# Altium PCB PCB.PcbDoc
Units mil, origin at the board's own origin, x right, y up, seen from the top; angles counter-clockwise.
Board outline 3460 x 2415 mil, 2 copper layers (Top Layer, Bottom Layer); 24 components, 26 nets, 88 pads, 0 vias.
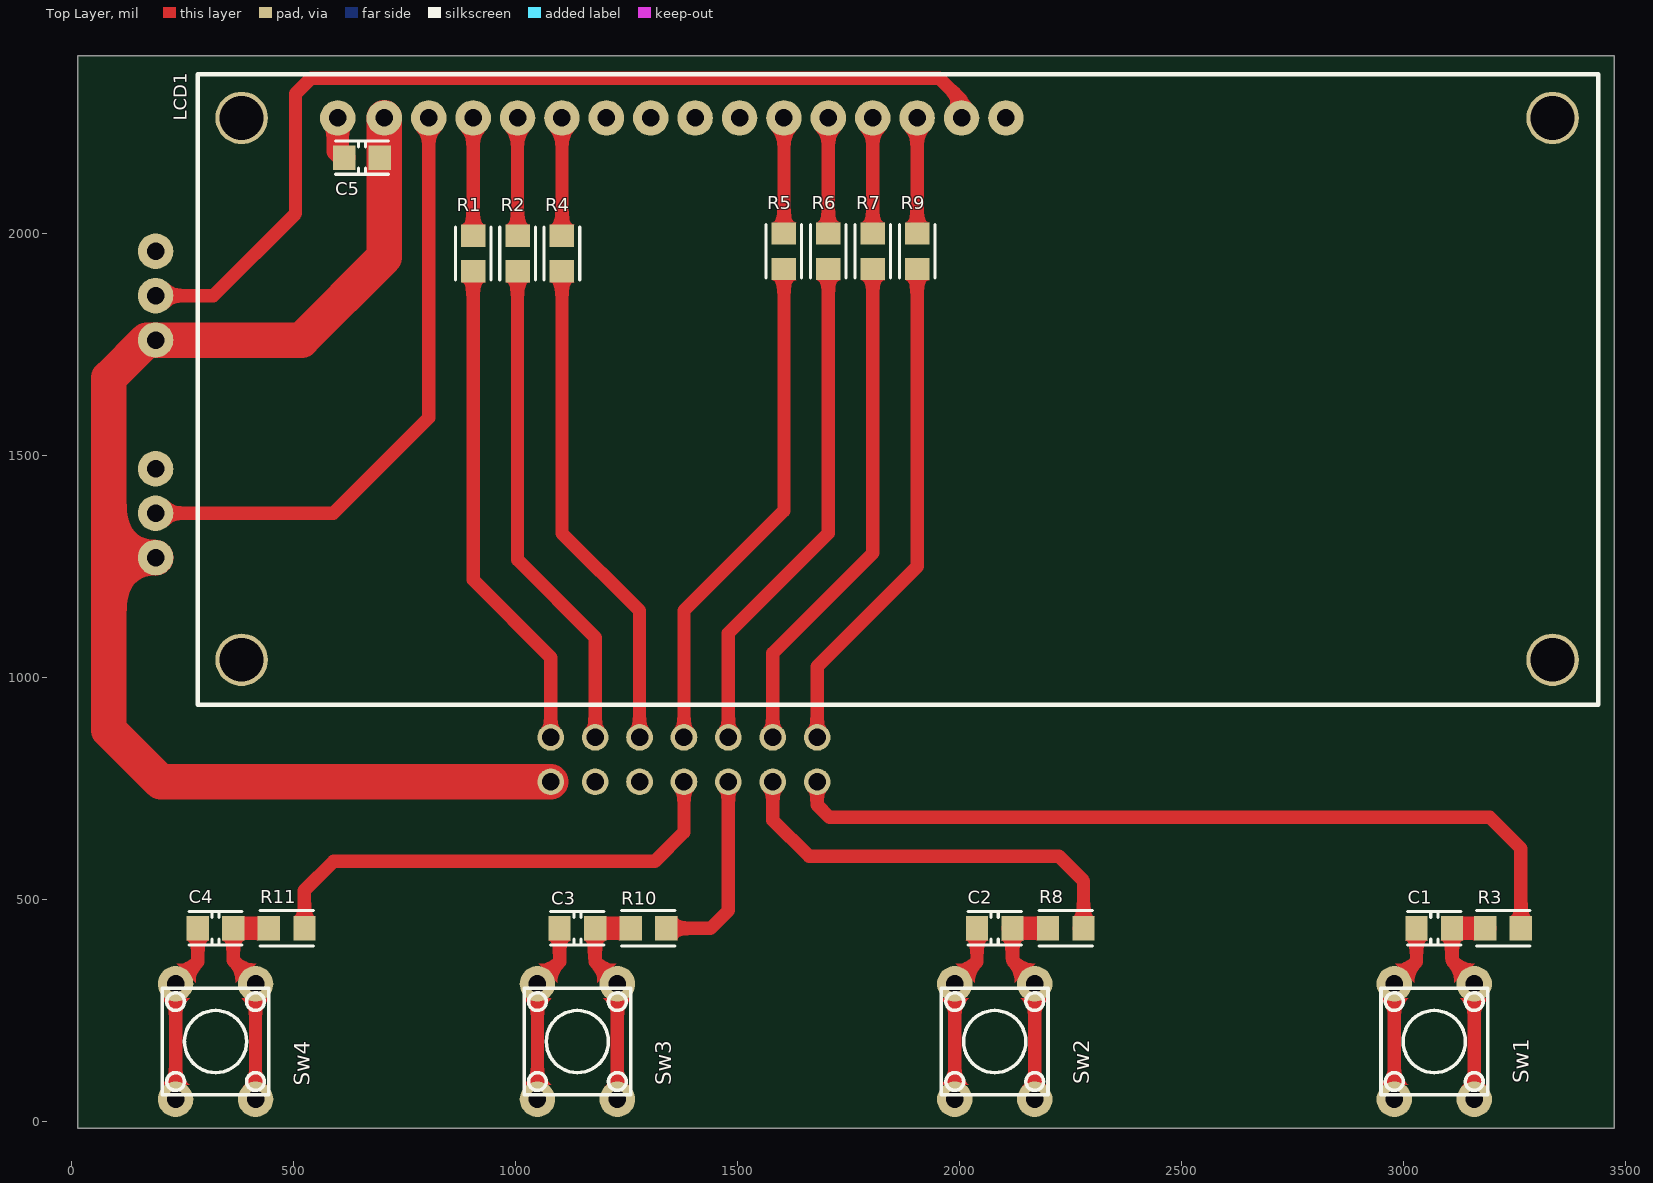
[diagram p0: Top Layer view]
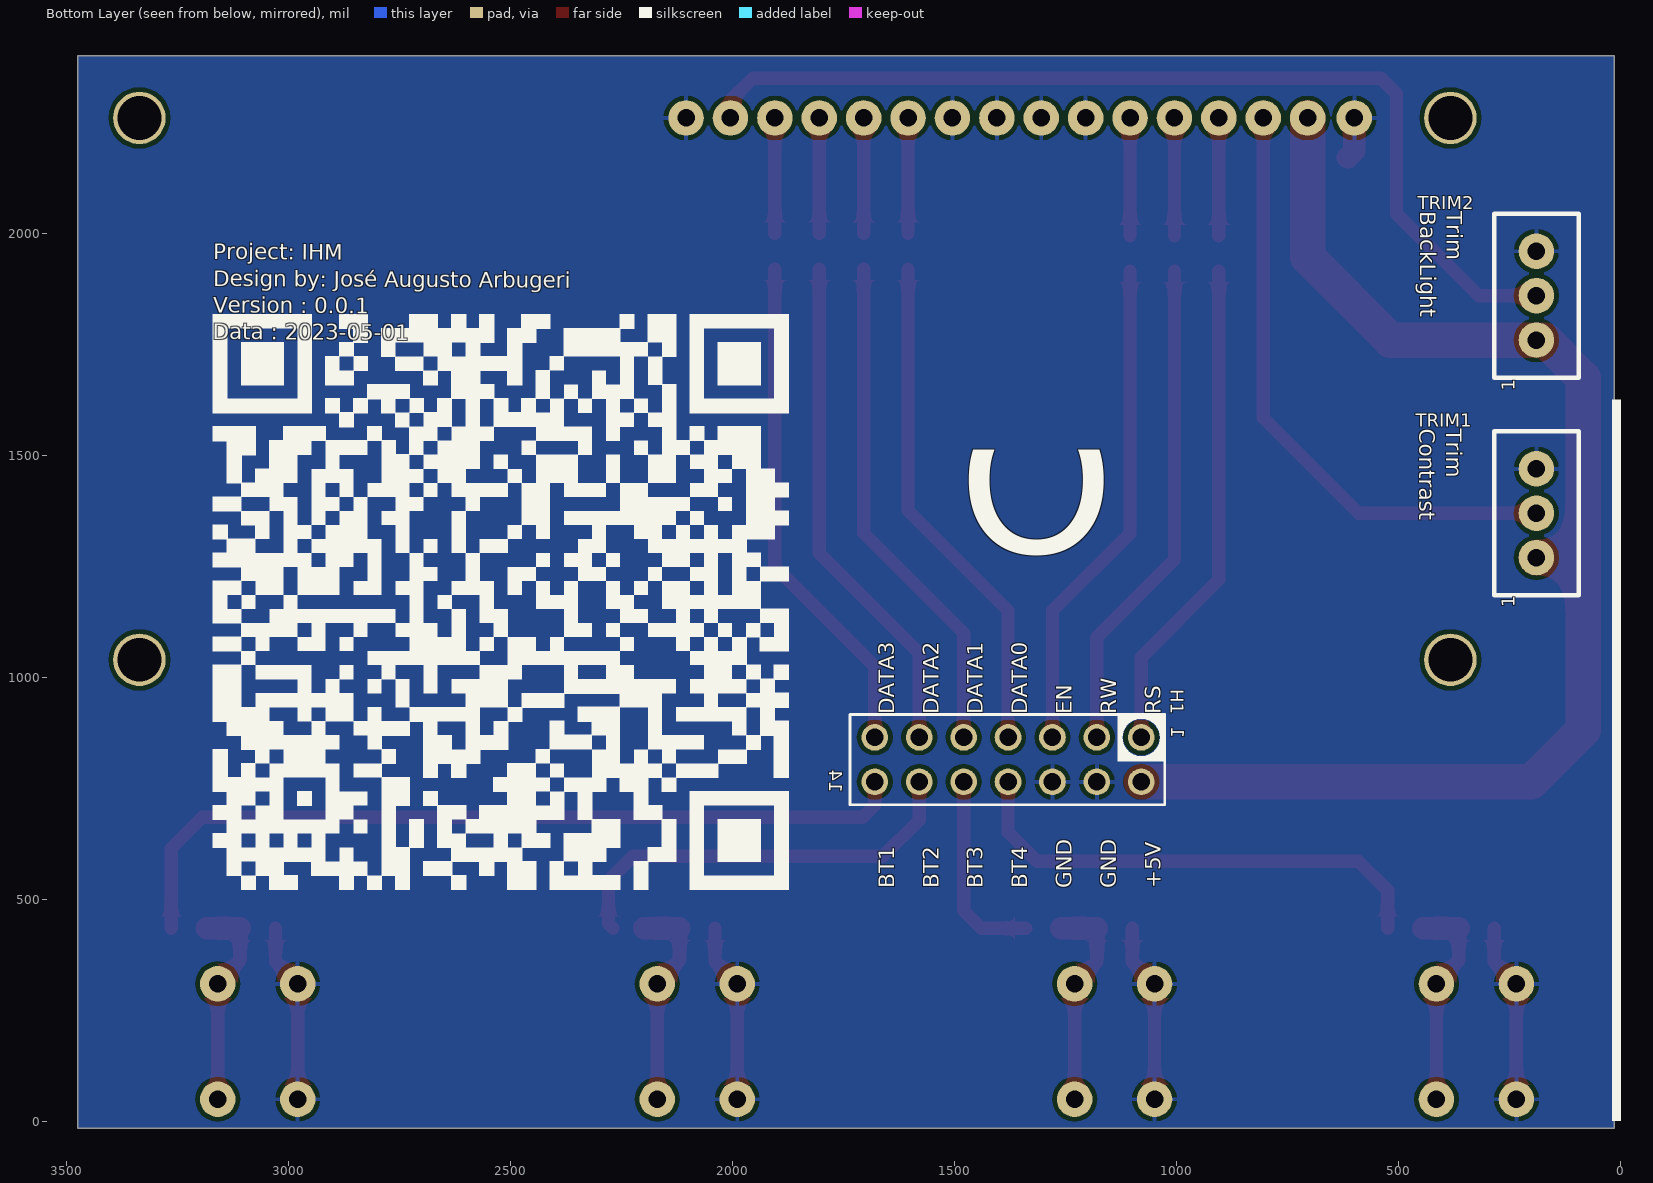
[diagram p1: Bottom Layer view, seen from below]
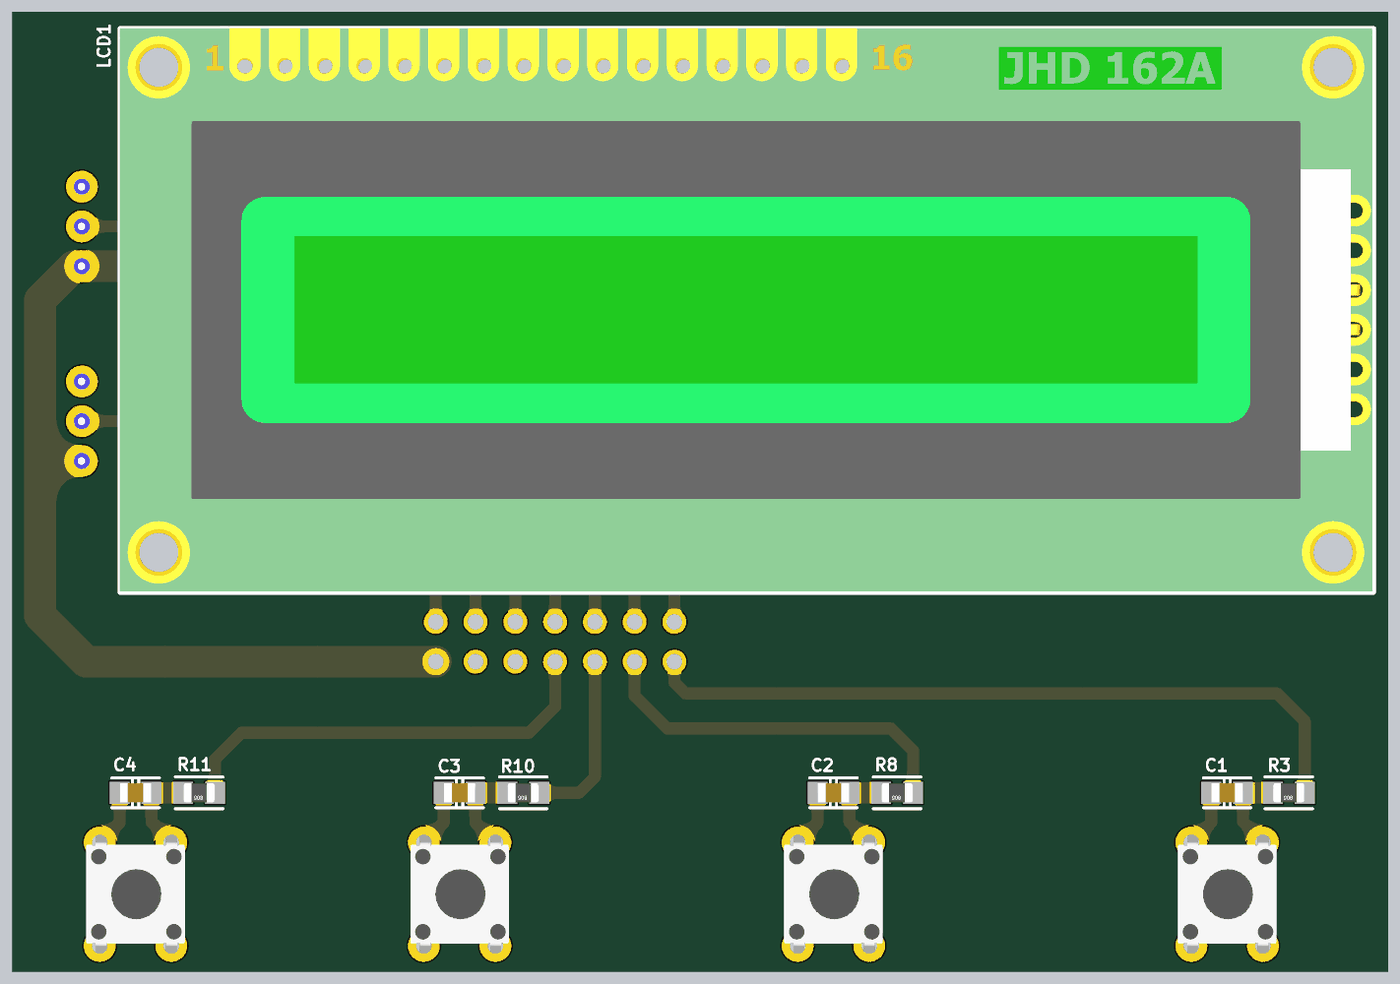
[diagram p2: 3D render of the assembled board from above, using the file's embedded part models]

## Layer stack, top to bottom
Top Solder: solder mask 0.4, Solder Resist, Dk 3.5
Top Layer: signal copper 1.4
Dielectric 1: dielectric 12.6, FR-4, Dk 4.8
Bottom Layer: signal copper 1.4
Bottom Solder: solder mask 0.4, Solder Resist, Dk 3.5

## Board outline
3475.25,2398.97 15.25,2398.97 15.25,-16.03 3475.25,-16.03

## Design rules (kind name [scope] priority, off if disabled: settings)
Clearance [All] p1: gap=10 ignorepadtopadclearanceinfootprint=FALSE except(0: Arc-Hole Track-Hole SMDPad-Hole THPad-Hole Via-Hole Fill-Hole Poly-Hole Region-Hole Text-Hole)
PolygonConnect [All] p1: connectstyle=Relief reliefconductorwidth=10 reliefentries=4 polygonreliefangle="90 Angle" airgapwidth=10
RoutingVias [All] p1: holewidth=28 width=50 viastyle="Through Hole" minholewidth=28 minwidth=50 maxholewidth=28 maxwidth=50
SilkToSilkClearance [All] p1: silktosilkclearance=0
SilkToSolderMaskClearance [IsPad] p1: minsilkscreentomaskgap=0 clearancetoexposedcopper=TRUE
SolderMaskExpansion [All] p1: expansion=4
Width [All] p1: maxlimit=100 minlimit=10 preferedwidth=30 minimp=50.000000 maximp=50.000000 favimp=50.000000
28 further rules are at their usual default settings.

## Components (designator, comment, footprint, x,y, rotation, side; value= is the part's Value field where it differs from the comment)
C1 "0805" 0805C 3070.25,433.97 r180 top value=100nF
C2 "0805" 0805C 2080.25,433.97 r180 top value=100nF
C3 "0805" 0805C 1140.25,433.97 r180 top value=100nF
C4 "0805" 0805C 325.25,433.97 r180 top value=100nF
C5 "0805" 0805C 655,2170 r180 top value=100nF
H1 "Header 2x7 Macho" "HEADER 2X7" 1380.25,813.97 r0 bottom
LCD1 "LCD*" LCD16X2 1860.25,1648.97 r0 top locked
R1 "0805" 0805 905.44,1953.97 r90 top value=50R
R2 "0805" 0805 1005.44,1953.97 r90 top value=50R
R3 "0805" 0805 3225.25,433.97 r180 top value=50R
R4 "0805" 0805 1105.44,1953.97 r90 top value=50R
R5 "0805" 0805 1605.44,1958.97 r90 top value=50R
R6 "0805" 0805 1705.44,1958.97 r90 top value=50R
R7 "0805" 0805 1805.44,1958.97 r90 top value=50R
R8 "0805" 0805 2240.25,433.97 r180 top value=50R
R9 "0805" 0805 1905.44,1958.97 r90 top value=50R
R10 "0805" 0805 1300.25,433.97 r180 top value=50R
R11 "0805" 0805 485.25,433.97 r180 top value=50R
Sw1 "SW_PUSH_BUTTON" PUSH_BUTTON 3070.25,178.97 r180 top
Sw2 "SW_PUSH_BUTTON" PUSH_BUTTON 2080.25,178.97 r180 top
Sw3 "SW_PUSH_BUTTON" PUSH_BUTTON 1140.25,178.97 r180 top
Sw4 "SW_PUSH_BUTTON" PUSH_BUTTON 325.25,178.97 r180 top
TRIM1 "Trimpot Vertical" "Trimpot Vertical" 190.25,1268.97 r90 bottom value=10k
TRIM2 "Trimpot Vertical" "Trimpot Vertical" 190.25,1758.97 r90 bottom value=10k

## Footprints (in the part's own frame and the unit in brackets; to place one, negate y for a bottom-side part, rotate by r counter-clockwise, add the part's x,y. Pads: shape width x height; smd on the part's side, far side on the other; paste and mask are expansions set on the pad)
0805 [mil]
  rect 50x55 smd: 1(-40,0) 2(40,0)
  silkscreen extent -60,-40 60,40, body extent -39,-25 39,25, height 31
0805C [mil]
  rect 50x55 smd: 1(-40,0) 2(40,0)
  silkscreen extent -60,-38 60,38, body extent -39,-25 39,25, height 39
"HEADER 2X7" [mil] "Barra Pin 2x 7 Macho contatos (Altura 8.4mm) 180°"
  round 60 hole 39.37: 1(-300,-50) 2(-300,50) 3(-200,-50) 4(-200,50) 5(-100,-50) 6(-100,50) 7(0,-50) 8(0,50) 9(100,-50) 10(100,50) 11(200,-50) 12(200,50) 13(300,-50) 14(300,50)
  silkscreen extent -356,-103 356,102, body extent -350,-99 350,102, height 453
LCD16X2 [mm]
  round 2.032 hole 1: 0(-32,15.5) 1(-29.332,15.5) 2(-26.792,15.5) 3(-24.252,15.5) 4(-21.712,15.5) 5(-19.172,15.5) 6(-16.632,15.5) 7(-14.092,15.5) 8(-11.552,15.5) 9(-9.012,15.5) 10(-6.472,15.5) 11(-3.932,15.5) 12(-1.392,15.5) 13(1.148,15.5) 14(3.688,15.5) 15(6.228,15.5)
  round 3 hole 2.5: ""(-37.5,-15.5) ""(-37.5,15.5) ""(37.5,-15.5) ""(37.5,15.5)
  silkscreen extent -40,-18.07 40.11,18, body extent -40,-18 40,18, height 13.39
PUSH_BUTTON [mil]
  round 80 hole 39.37: 1(-90,130) 1(-90,-130) 2(90,130) 2(90,-130)
  silkscreen extent -120,-120 120,120, body extent -124,-156 120,156, height 170
"Trimpot Vertical" [mil]
  round 80 hole 39.37: 1(0,0) 2(100,0) 3(200,0)
  silkscreen extent -85,-95 285,95, body extent -81,-95 281,94, height 479

## Part data
C1 C2 C3 C4 C5: library part "Capacitor SMD 0805", "Capacitor SMD 0805"
LCD1: library part "LCD 16x2", "LCD 16x2"
R1 R2 R3 R4 R5 R6 R7 R8 R9 R10 R11: library part "Resistor SMD 0805 1/8 W", "Resistor SMD 0805 1/8 W", %=±1%, P=1/8W
Sw1 Sw2 Sw3 Sw4: library part SW-PB, "Switch Push Button", LatestRevisionDate=17-Jul-2002, LatestRevisionNote="Re-released for DXP Platform.", PackageReference=SPST-2, Published=24-Mar-1999, Publisher="Altium Limited"

## Nets (pads, with @x,y where several pads share a name; then routed paths per layer and width w, separated by ;. In a path a pad name is that pad's centre, name@x,y a point inside that pad or via, vN(x,y) a via of type N, cw(c..) or ccw(c..) an arc to the next point about the centre after c; other vN are vias at no path point)
+5V: C5.1 H1.2 LCD1.1 TRIM1.1 TRIM2.1 | length 2988.9
  Top Layer w80: TRIM1.1 85,1268.97 ; LCD1.1 705.44,2170 705.44,1945.44 518.97,1758.97 TRIM2.1 170.25,1758.97 85,1673.73 85,1268.97 ; H1.2 201.27,763.97 85,880.25 85,1268.97
A: LCD1.14 TRIM2.2 | length 2256.7
  Top Layer w30: TRIM2.2@170.25,1858.97 320.25,1858.97 505.25,2043.97 505.25,2313.97 540.25,2348.97 1955.25,2348.97 2005.44,2298.77 LCD1.14
BT1: C1.1 R3.2 Sw1.1 | length 480.7
  Top Layer w30: C1.1 3110.25,361.47 3160.25,311.47 3160.25,308.97 Sw1.1@3160.25,48.97
  Top Layer w50: C1.1 R3.2
BT1_O: H1.14 R3.1 | length 1857.7
  Top Layer w30: H1.14 1680.25,711.75 1708,684 3195.22,684 3265.25,613.97 R3.1
BT2: C2.1 R8.2 Sw2.1 | length 483.2
  Top Layer w30: C2.1 2120.25,361.47 Sw2.1@2170.25,311.47 ; Sw2.1@2170.25,48.97 Sw2.1@2170.25,308.97
  Top Layer w50: C2.1 R8.2
BT2_O: H1.12 R8.1 | length 953.9
  Top Layer w30: H1.12 1580.25,677.75 1662,596 2225,596 2280.25,540.75 2280.25,443.97 R8.1@2270.25,433.97
BT3: C3.1 R10.2 Sw3.1 | length 485.7
  Top Layer w30: C3.1 1180.25,358.97 1230.25,308.97 Sw3.1@1230.25,48.97
  Top Layer w50: C3.1 R10.2
BT3_O: H1.10 R10.1 | length 446.6
  Top Layer w30: R10.1 1440.25,433.97 1480.25,473.97 H1.10
BT4: C4.1 R11.2 Sw4.1 | length 483.2
  Top Layer w30: C4.1 365.25,361.47 Sw4.1@415.25,311.47 ; Sw4.1@415.25,48.97 Sw4.1@415.25,308.97
  Top Layer w50: C4.1 R11.2
BT4_O: H1.8 R11.1 | length 1108.3
  Top Layer w30: R11.1 525.25,519.25 591,585 1315.03,585 1380.25,650.22 H1.8
DATA0_I: H1.7 R5.1 | length 1148.3
  Top Layer w30: H1.7 1380.25,1148.97 1605.44,1374.17 R5.1
DATA1_I: H1.9 R6.1 | length 1148.3
  Top Layer w30: H1.9 1480.25,1098.97 1705.44,1324.17 R6.1
DATA2_I: H1.11 R7.1 | length 1148.3
  Top Layer w30: H1.11 1580.25,1053.97 1805.44,1279.17 R7.1
DATA3_I: H1.13 R9.1 | length 1148.3
  Top Layer w30: H1.13 1680.25,1023.77 1905.44,1248.97 R9.1
EN: LCD1.5 R4.2 | length 265.2
  Top Layer w30: R4.2 LCD1.5
EN_I: H1.5 R4.1 | length 1122.4
  Top Layer w30: R4.1 1105.44,1323.77 1280.25,1148.97 H1.5
GND: C1.2 C2.2 C3.2 C4.2 C5.2 H1.4 H1.6 LCD1.0 LCD1.6 LCD1.7 LCD1.8 LCD1.9 LCD1.15 Sw1.2 Sw2.2 Sw3.2 Sw4.2 TRIM1.3 TRIM2.3 | length 1718.1
  Top Layer w30: Sw4.2@235.25,48.97 235.25,308.97 285.25,358.97 C4.2 ; Sw3.2@1050.25,48.97 1050.25,308.97 1100.25,358.97 C3.2 ; Sw2.2@1990.25,48.97 1990.25,308.97 2040.25,358.97 C2.2 ; Sw1.2@2980.25,48.97 2980.25,308.97 3030.25,358.97 C1.2
  Top Layer w50: LCD1.0 600.4,2184.6 C5.2
PB0: LCD1.11 R6.2 | length 260.2
  Top Layer w30: R6.2 LCD1.11
PB4: LCD1.12 R7.2 | length 260.2
  Top Layer w30: R7.2 LCD1.12
PB5: LCD1.13 R9.2 | length 260.2
  Top Layer w30: R9.2 LCD1.13
PD7: LCD1.10 R5.2 | length 260.2
  Top Layer w30: R5.2 LCD1.10
RS: LCD1.3 R1.2 | length 265.2
  Top Layer w30: R1.2 LCD1.3
RS_I: H1.1 R1.1 | length 1122.4
  Top Layer w30: R1.1 905.44,1218.77 1080.25,1043.97 H1.1
RW: LCD1.4 R2.2 | length 265.2
  Top Layer w30: R2.2 LCD1.4
RW_I: H1.3 R2.1 | length 1122.4
  Top Layer w30: R2.1 1005.44,1263.77 1180.25,1088.97 H1.3
VEE: LCD1.2 TRIM1.2 | length 1399.4
  Top Layer w30: TRIM1.2@170.25,1368.97 590.25,1368.97 805.44,1584.17 LCD1.2
pads on no net: LCD1.

## Polygon pours and split planes (outlines as drawn)
GND on Bottom Layer "Bottom Layer-GND" (solid, pour order 0): 3475.25,-16.03 3475.25,2398.97 15.25,2398.97 15.25,-16.03

## Silkscreen, mask and mechanical layers (free items; w line width, h text height)
Bottom Overlay:
  drawing of 16 lines, arcs and shapes, not listed
  text "Trim / BackLight" at 464,2049 h60 r90
  text "Project: IHM / Design by: José Augusto Arbugeri / Version : 0.0.1 / Data : 2023-05-01" at 3171.1,1748.18 h60 r0.29
  text "Trim / Contrast" at 466,1559 h60 r90
  text "O" at 1493,1019.16 h1377.95
  text "RS" at 1024.34,916.33 h60 r270
  text "RW" at 1124.34,916.33 h60 r270
  text "EN" at 1224.34,916.33 h60 r270
  text "DATA0" at 1324.34,916.33 h60 r270
  text "DATA1" at 1424.34,916.33 h60 r270
  text "DATA2" at 1524.34,916.33 h60 r270
  text "DATA3" at 1624.34,916.33 h60 r270
  text "1" at 1013,862 h30 r90
  text "14" at 1783,739 h30 r90
  text "+5V" at 1024.34,524.36 h60 r270
  text "GND" at 1124.34,524.36 h60 r270
  text "GND" at 1224.34,524.36 h60 r270
  text "BT4" at 1324.34,524.36 h60 r270
  text "BT3" at 1424.34,524.36 h60 r270
  text "BT2" at 1524.34,524.36 h60 r270
  text "BT1" at 1624.34,524.36 h60 r270
Mechanical 1:
  the board outline again, w1

## Text inside footprints (layer, text, board x,y; h text height)
TRIM1: Bottom Overlay "1" at 239,1157 h30 r270
TRIM2: Bottom Overlay "1" at 239,1645 h30 r270